# Altium PCB FRONT-UNIT-7.PcbDoc (part 1 of 2)
Units mm, origin at the board's own origin, x right, y up, seen from the top; angles counter-clockwise.
Board outline 281 x 128.5 mm, 2 copper layers (Top Layer, Top, Bottom Layer, Bottom), stack 1.671 mm thick; 95 components, 85 nets, 388 pads, 394 vias.
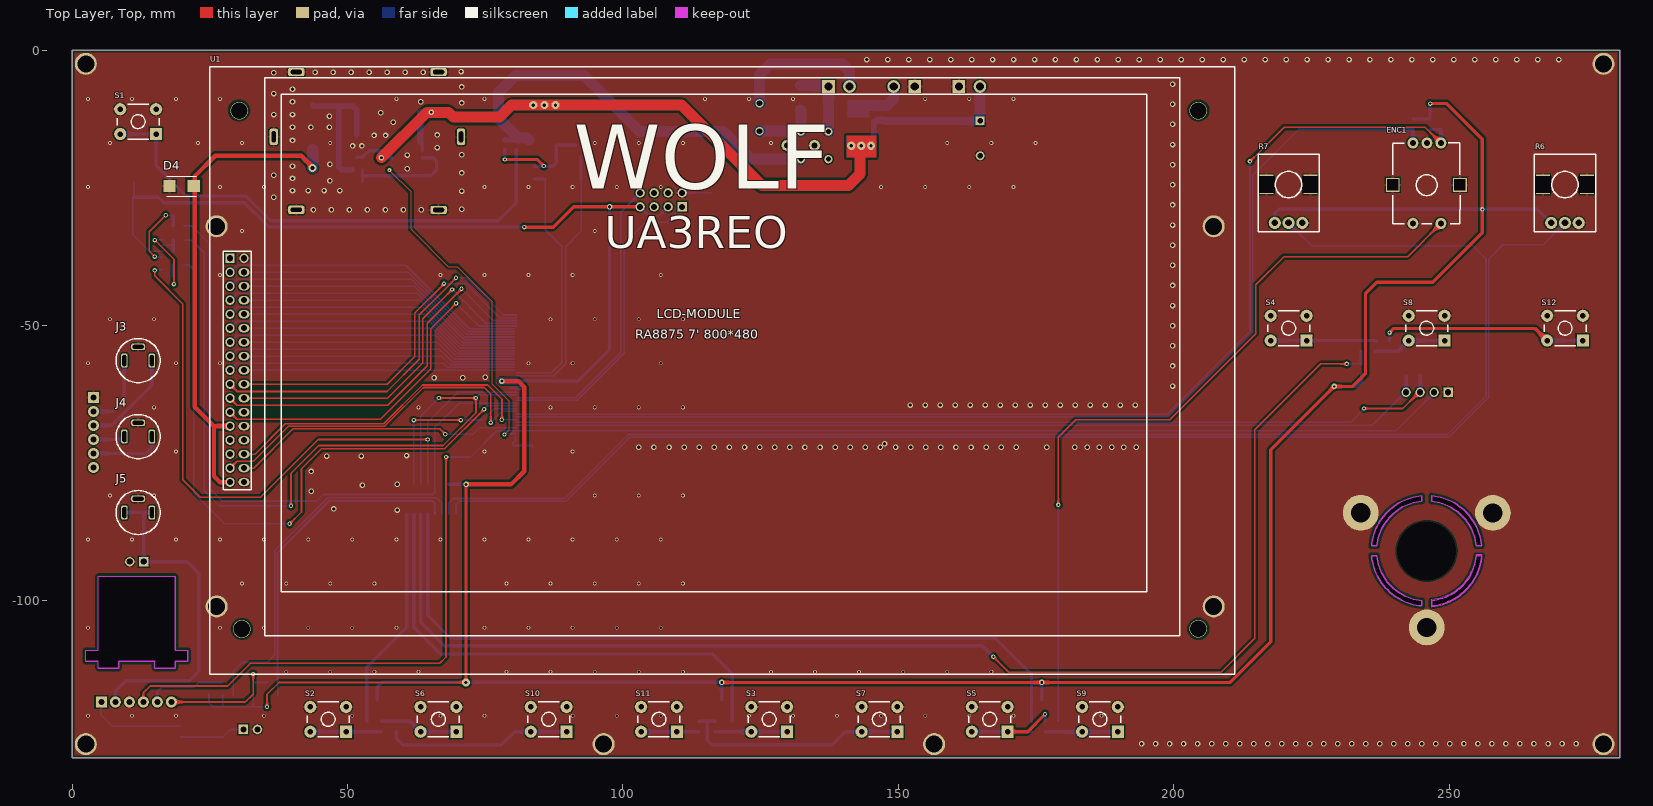
[diagram p0: Top Layer, Top view]
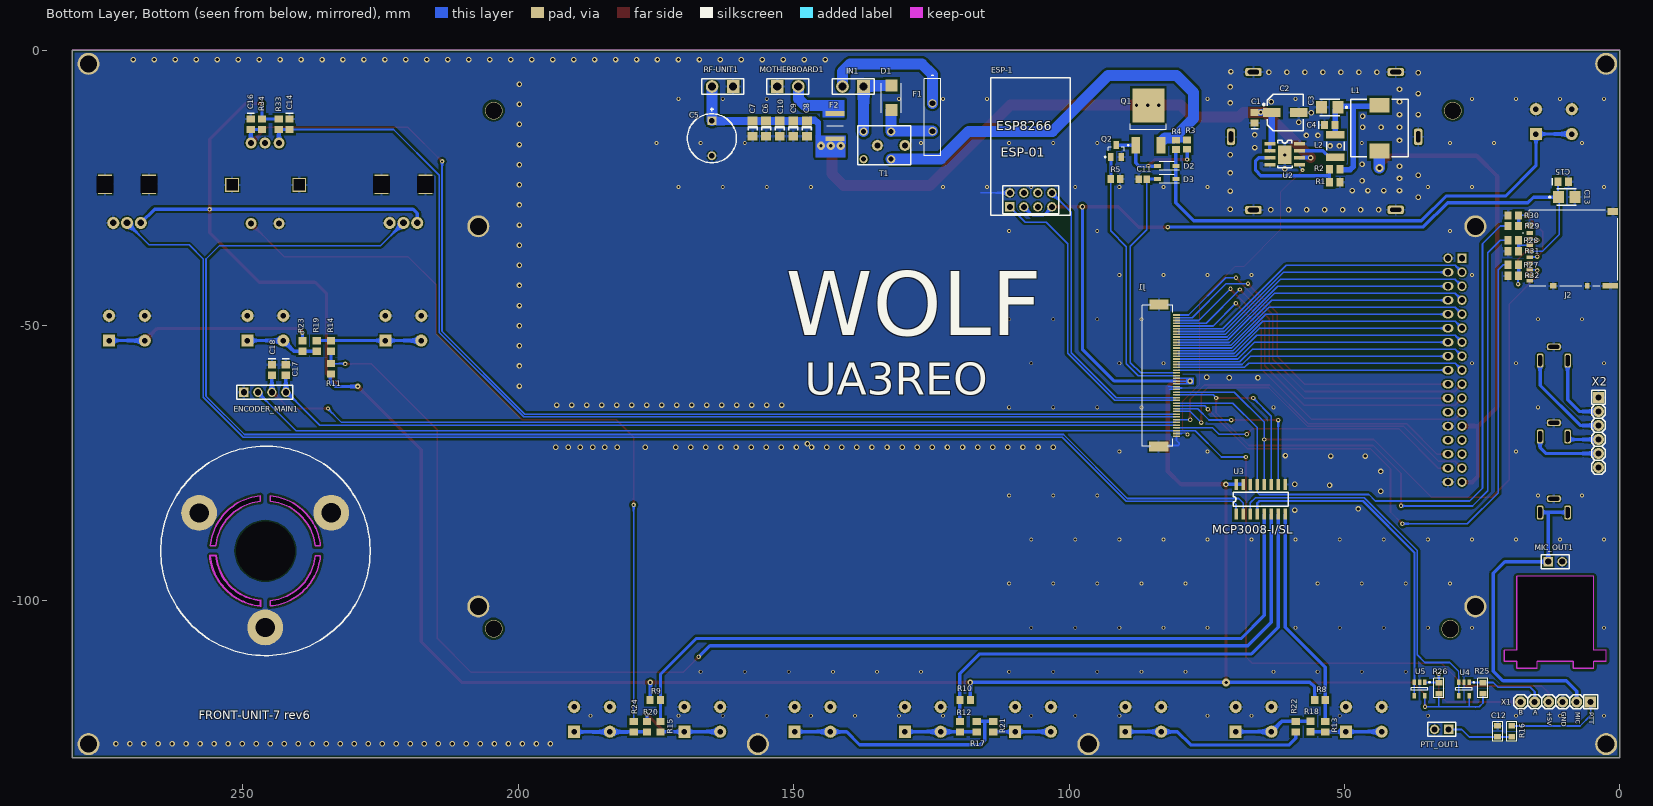
[diagram p1: Bottom Layer, Bottom view, seen from below]

## Layer stack, top to bottom
Top Solder, Top Mask: solder mask 0.0102, Solder Resist, Dk 3.5
Top Layer, Top: signal copper 0.0356
Dielectric 1: dielectric 1.6, FR-4, Dk 4.8
Bottom Layer, Bottom: signal copper 0.0356
Bottom Solder, Bot Mask: solder mask 0.0102, Solder Resist, Dk 3.5

## Board outline
0,-1 0,0 281,0 281,-128.5 0,-128.5
cut-out: 255.937,-91.681 ccw(c255.85,-91.775) 255.85,-91.647 254.925,-91.647 ccw(c254.925,-91.775) 254.798,-91.775 ccw(c254.925,-91.775) 254.798,-91.776 ccw(c254.923,-91.797) 254.796,-91.785 cw(c245.9,-90.925) 246.833,-99.814 ccw(c246.846,-99.941) 246.729,-99.891 ccw(c246.825,-99.975) 246.698,-99.975 246.698,-100.9 ccw(c246.825,-100.9) 246.769,-101.014 ccw(c246.846,-100.913) 246.858,-101.04 ccw(c245.9,-90.925) 256.021,-91.813 ccw(c255.895,-91.802)
cut-out: 255.896,-90.023 ccw(c245.9,-90.925) 246.806,-80.929 246.8,-80.95 246.8,-81.9 246.802,-81.909 cw(c245.9,-90.925) 254.915,-90.014 254.925,-90.025
cut-out: 245.036,-80.929 ccw(c245.9,-90.925) 235.907,-90.026 235.925,-90.025 236.875,-90.025 cw(c245.9,-90.925) 245.027,-81.897 245.05,-81.9
cut-out: 245.051,-99.961 cw(c245.9,-90.925) 236.866,-91.794 236.85,-91.775 235.9,-91.775 235.899,-91.773 ccw(c245.9,-90.925) 245.046,-100.925 245.05,-100.9
cut-out: 4.75,-112.25 4.75,-111 2.5,-111 2.5,-109 4.75,-109 4.75,-95.5 18.75,-95.5 18.75,-109 21,-109 21,-111 18.75,-111 18.75,-112.25 15,-112.25 15,-111 8.5,-111 8.5,-112.25

## Design rules (kind name [scope] priority, off if disabled: settings)
BoardOutlineClearance [All] p1: gap=0.3 ignorepadtopadclearanceinfootprint=FALSE
Clearance Clearance_NPTH [All vs InPadClass('NPTH')] p1: gap=0.4 ignorepadtopadclearanceinfootprint=FALSE except(0: Arc-Hole Track-Hole SMDPad-Hole THPad-Hole Via-Hole Fill-Hole Poly-Hole Region-Hole Text-Hole)
Clearance Clearance_MultiLayerPad [OnLayer('Multi-Layer') and IsPad] p2: gap=0.25 ignorepadtopadclearanceinfootprint=FALSE except(0: Arc-Hole Track-Hole SMDPad-Hole THPad-Hole Via-Hole Fill-Hole Poly-Hole Region-Hole Text-Hole)
Clearance Clearance_Polygon [InPolygon] p3: gap=0.4 ignorepadtopadclearanceinfootprint=FALSE except(0: Arc-Hole Track-Hole SMDPad-Hole THPad-Hole Via-Hole Fill-Hole Poly-Hole Region-Hole Text-Hole; 1: Poly-Poly)
Clearance [All] p4: gap=0.15 ignorepadtopadclearanceinfootprint=FALSE except(0: Arc-Hole Track-Hole SMDPad-Hole THPad-Hole Via-Hole Fill-Hole Poly-Hole Region-Hole Text-Hole)
ComponentClearance [All] p1: gap=0 collisioncheckmode=3 verticalgap=0 showdistances=FALSE
Height [All] p1: minheight=0 maxheight=60 prefheight=12.7
HoleSize [All] p1: absolutevalues=TRUE maxlimit=5 minlimit=0.025 maxpercent=80.000 minpercent=20.000
HoleToHoleClearance [All] p1: gap=0.2 allowstackedmicrovias=TRUE
MinimumSolderMaskSliver [All] p1: minsoldermaskwidth=0.04
PlaneClearance [All] p1: clearance=0.5
PlaneConnect [All] p1: planeconnectstyle=Relief reliefexpansion=0.5 reliefentries=4 reliefconductorwidth=0.3 reliefairgap=0.2
PolygonConnect PolygonConnect_PowerPAD [All vs InPadClass('PowerPAD')] p1: connectstyle=Relief reliefconductorwidth=1 reliefentries=4 polygonreliefangle="90 Angle" airgapwidth=0.3
PolygonConnect PolygonConnect_PadGND [InNet('GND') and IsPad] p2: connectstyle=Relief reliefconductorwidth=0.5 reliefentries=4 polygonreliefangle="90 Angle" airgapwidth=0.2
PolygonConnect PolygonConnect_Via [IsVia] p3: connectstyle=Direct reliefconductorwidth=0.254 reliefentries=4 polygonreliefangle="90 Angle" airgapwidth=0.254
PolygonConnect [All] p4: connectstyle=Relief reliefconductorwidth=0.6 reliefentries=4 polygonreliefangle="90 Angle" airgapwidth=0.3
RoomDefinition FRONT-UNIT-7 [InComponentClass('FRONT-UNIT-7')] p1: confinementstyle=ConfineIn formatcopy=TRUE lockcomponents=FALSE outline 0,-128.862 280.5,-128.862 280.5,1 0,1
RoutingVias [All] p1: holewidth=0.3 width=0.7 viastyle="Through Hole" minholewidth=0.3 minwidth=0.7 maxholewidth=3 maxwidth=5
SilkToSilkClearance [All] p1: silktosilkclearance=0
SilkToSolderMaskClearance [IsPad] p1: minsilkscreentomaskgap=0.05 clearancetoexposedcopper=TRUE
SolderMaskExpansion [All] p1: expansion=0.075 istentingtop=FALSE
Width [All] p1: maxlimit=10 minlimit=0.15 preferedwidth=0.3
21 further rules are at their usual default settings.

## Components (designator, comment, footprint, x,y, rotation, side; value= is the part's Value field where it differs from the comment)
C1 "100n" CAP_0805 66.325,-12.5 r90 bottom
C2 "4.7uF 16V" CAPAE_6.6x6.6h5.4 60.85,-11.35 r180 bottom
C3 "22uF 10V" CAPAE_4.3x4.3h5.4 52.3,-10.4 r0 bottom
C4 "100n" CAP_0805 52.9,-13.6 r180 bottom
C5 "1000uF" CAP250RP 164.85,-15.473 r270 bottom
C6 "1uF" CAP_1206 154.988,-14.265 r270 bottom
C7 "100n" CAP_1206 157.446,-14.265 r270 bottom
C8 "1n" CAP_1206 147.614,-14.265 r270 bottom
C9 "470p" CAP_1206 150.072,-14.265 r270 bottom
C10 "120p" CAP_1206 152.53,-14.265 r270 bottom
C11 "8.2n" CAPC2013X94X50LL20T25 86.625,-23.425 r180 bottom
C12 "0.1" CH0805C 22.2,-123.7 r270 bottom
C13 "22uF 10V" EEEFC_sizeB 10.1,-26.7 r180 bottom
C14 "100n" CAP_0805 241.525,-13.275 r270 bottom
C15 "100n" CAP_0805 10.5,-23.9 r180 bottom
C16 "100n" CAP_0805 248.575,-13.275 r270 bottom
C17 "10n" CAP_0805 242.2,-57.875 r270 bottom
C18 "10n" CAP_0805 244.7,-57.875 r270 bottom
D1 "SM6T15A" SMBJ36CATR 132.25,-8.671 r90 bottom
D2 "1n4148w" SOD3716X135N 82.275,-21.075 r0 bottom
D3 "1n4148w" SOD3716X135N 82.275,-23.425 r0 bottom
D4 "SMAJ5.0A-TR" SMBJ36CATR 19.9,-24.7 r180 top
ENC1 "PEC12" PEC12 245.85,-24.183 r0 top
ENCODER_MAIN1 "OPTICAL ENCODER" 644456-4 245.995,-61.49 r180 bottom
ESP-1 "ESP-01 ESP8266" "ESP-01 ESP8266" 107,-17.525 r180 bottom
F1 "RUEF400" RUEF400 124.8,-12.198 r270 bottom
F2 "MF-MSMF110_16-2" FUSC4632X85N 142.475,-13.823 r90 bottom
IN1 "JX2" JX2 139.225,-6.623 r0 bottom value=13.8V
J1 "FPC-45P-0.5mm" FH12S45S05SH60 81.15,-59.1 r90 bottom
J2 "DM3AT-SF-PEJM5" DM3ATSFPEJM5 9,-36 r90 bottom
J3 "PJ-3,5" Audio-PJ-392 11.4,-62.275 r0 top
J4 "PJ-3,5" Audio-PJ-392 11.4,-76.067 r0 top
J5 "PJ-3,5" Audio-PJ-392 11.4,-89.858 r0 top
L1 "10uH" IND_FERRITE_CORE 43.675,-14.175 r90 bottom
L2 "3.3uH" IND_1812 51.675,-17.425 r90 bottom
MIC_OUT1 "MIC_OUT" 51022-0200 11.75,-92.25 r180 bottom
MOTHERBOARD1 "JX2" JX2 151.062,-6.623 r180 bottom value=13.8V
PTT_OUT1 "PTT_OUT" 51022-0200 32.38,-123.96 r0 bottom
Q1 "IRFR9024NPBF" ONSC-DPAK-3-369C-01_V 85.625,-12.9 r90 bottom
Q2 "BSS123" FAIR-SOT23-3_V 91.45,-18.325 r180 bottom
R1 "4.7k" RES_0805 51.775,-24.025 r0 bottom
R2 "15k" RES_0805 51.775,-21.625 r180 bottom
R3 "30k" RESC2013X60X40NL20T25 78.575,-17.175 r90 bottom
R4 "30k" RESC2013X60X40NL20T25 80.625,-17.2 r90 bottom
R5 "30k" RESC2013X60X40NL20T25 91.6,-23.425 r0 bottom
R6 "ptv09a-4225f-b102" PTV09 271.025,-25.925 r0 top value="AF GAIN 1k"
R7 "ptv09a-4225f-b102" PTV09 220.85,-25.925 r0 top value="SHIFT 1k"
R8 "4.7k" RES_0805 54.45,-117.975 r0 bottom
R9 "4.7k" RES_0805 175.125,-117.975 r0 bottom
R10 "4.7k" RES_0805 118.875,-117.975 r180 bottom
R11 "4.7k" RES_0805 233.975,-57.875 r270 bottom
R12 "1k" RES_0805 119.825,-122.825 r90 bottom
R13 "1k" RES_0805 53.5,-122.825 r90 bottom
R14 "1k" RES_0805 233.975,-53.725 r270 bottom
R15 "1k" RES_0805 174.175,-122.825 r90 bottom
R16 "100" CH0805R 19.65,-123.7 r270 bottom
R17 "2k" RES_0805 116.788,-122.825 r270 bottom
R18 "2k" RES_0805 56.175,-122.798 r270 bottom
R19 "2k" RES_0805 236.575,-53.725 r90 bottom
R20 "2k" RES_0805 176.612,-122.825 r90 bottom
R21 "4.7k" RES_0805 113.75,-122.825 r90 bottom
R22 "4.7k" RES_0805 58.85,-122.825 r90 bottom
R23 "4.7k" RES_0805 239.175,-53.725 r270 bottom
R24 "4.7k" RES_0805 179.05,-122.825 r270 bottom
R25 "47k" CH0805R 24.875,-115.825 r270 bottom
R26 "47k" CH0805C 32.875,-115.825 r270 bottom
R27 "0" RES_0805 19.35,-39 r0 bottom
R28 "0" RES_0805 19.35,-34.525 r0 bottom
R29 "0" RES_0805 19.35,-31.95 r0 bottom
R30 "3.3k" RES_0805 19.35,-30.025 r180 bottom
R31 "3.3k" RES_0805 19.35,-36.525 r180 bottom
R32 "3.3k" RES_0805 19.35,-41 r180 bottom
R33 "4.7k" RES_0805 243.45,-13.475 r90 bottom
R34 "4.7k" RES_0805 246.525,-13.475 r90 bottom
RF-UNIT1 "JX2" JX2 162.9,-6.623 r0 bottom value=13.8V
S1 "PTS645SK50LFS" PTS645SK50LFS 12,-13 r180 top value=PWR
S2 "PTS645SK50LFS" PTS645SK50LFS 46.5,-121.5 r180 top
S3 "PTS645SK50LFS" PTS645SK50LFS 126.557,-121.5 r180 top
S4 "PTS645SK50LFS" PTS645SK50LFS 220.85,-50.498 r180 top
S5 "PTS645SK50LFS" PTS645SK50LFS 166.586,-121.5 r180 top
S6 "PTS645SK50LFS" PTS645SK50LFS 66.514,-121.5 r180 top
S7 "PTS645SK50LFS" PTS645SK50LFS 146.571,-121.5 r180 top
S8 "PTS645SK50LFS" PTS645SK50LFS 245.9,-50.498 r180 top
S9 "PTS645SK50LFS" PTS645SK50LFS 186.6,-121.5 r180 top
S10 "PTS645SK50LFS" PTS645SK50LFS 86.529,-121.5 r180 top
S11 "PTS645SK50LFS" PTS645SK50LFS 106.543,-121.5 r180 top
S12 "PTS645SK50LFS" PTS645SK50LFS 271.025,-50.498 r180 top
T1 "BNX016-01" TRANSF_ICORE 133.55,-17.323 r180 bottom
U1 "LCD-RA8875" LCD-RA8875 25,-3 r0 top locked
U2 "ST1S10" ST1S10 60.85,-18.9 r180 bottom
U3 "MCP3008-I/SL" MCP3008-I/SL 65.2,-81.55 r90 bottom
U4 "MCP6001UT" SOT23-5 28.325,-115.975 r270 bottom
U5 "MCP6001UT" SOT23-5 36.375,-115.975 r270 bottom
X1 "PTT" "CON: PLS-6" 11.675,-118.35 r0 bottom
X2 "PTT" "CON: PLS-6" 3.9,-69.425 r270 bottom

## Footprints (in the part's own frame and the unit in brackets; to place one, negate y for a bottom-side part, rotate by r counter-clockwise, add the part's x,y. Pads: shape width x height; smd on the part's side, far side on the other; paste and mask are expansions set on the pad)
51022-0200 [mm]
  rect 1.7x1.7 hole 1.1: 1(-1.27,-0.635)
  round 1.7 hole 1.1: 2(1.27,-0.635)
  silkscreen extent -2.54,-1.91 2.54,0.64
644456-4 [mm]
  rect 1.7x1.7 hole 1.1: 1(-3.81,-0.635)
  round 1.7 hole 1.1: 2(-1.27,-0.635) 3(1.27,-0.635) 4(3.81,-0.635)
  silkscreen extent -5.08,-1.91 5.08,0.64
Audio-PJ-392 [mm]
  rrect50% 2.5x1.2 hole 2 slot 0.7 at 90 deg: 1(0.6,8.4)
  rrect50% 1.2x2.5 hole 2 slot 0.7 at 0 deg: 2(-1.9,5.9) 3(3.1,5.9)
  silkscreen extent -3.4,1.9 4.6,9.9, body extent -3.69,1.36 4.84,10.52, height 5.8
CAP250RP [mm]
  rect 1.6x1.6 hole 1: 1(-2.631,0)
  round 1.6 hole 1: 2(3.719,0)
  silkscreen extent -4.99,-4.45 4.99,4.45
CAP_0805 [mm]
  rect 1.3x1.5 smd: 1(-0.75,0) 2(1.15,0)
  silkscreen extent -1.8,-0.65 -1.8,0.65
CAP_1206 [mm]
  rect 1.6x1.8 smd: 1(-1.4,0) 2(1.4,0)
  silkscreen extent -0.3,-0.8 0.3,0.8
CAPAE_4.3x4.3h5.4 [mm]
  rect 2x2.2 smd: 1(-1.1,0) 2(1.9,0)
  silkscreen extent -2.9,-1.5 2.2,1.5
CAPAE_6.6x6.6h5.4 [mm]
  rect 3.15x1.6 smd: 1(-2.362,0) 2(2.538,0)
  silkscreen extent -4.11,-3.3 3.39,3.3
CAPC2013X94X50LL20T25 [mm] "Chip Capacitor, 2-Leads, Body 2.01x1.25mm, IPC High Density"
  rect 1.15x1.35 smd: 1(-0.725,0) 2(0.725,0)
  body extent -1.1,-0.72 1.1,0.72, height 0.94
CH0805C [mm] "Chip Capacitor, 2-Leads, Body 2,00x1,20mm, IPC Medium Density"
  rect 1x1.25 smd: 1(-1,0) 2(1,0)
  silkscreen extent -1.8,-0.9 1.8,0.9, body extent -1,-0.62 1,0.63, height 0.78
CH0805R [mm]
  rect 1x1.25 smd: 1(-1,0) 2(1,0)
  silkscreen extent -1.8,-0.9 1.8,0.9, body extent -1,-0.6 1,0.6, height 0.44
"CON: PLS-6" [mm]
  rect 2x2 hole 1.1: 1(-6.35,0)
  round 2 hole 1.1: 2(-3.81,0) 3(-1.27,0) 4(1.27,0) 5(3.81,0) 6(6.35,0)
  silkscreen extent -7.62,-1.27 7.62,1.27, body extent -7.62,-1.27 7.62,1.27, height 8.54
DM3ATSFPEJM5 [mm]
  rect 0.7x1.2 smd: 1(2.775,7.412) 2(1.675,7.412) 3(0.575,7.412) 4(-0.525,7.412) 5(-1.625,7.412) 6(-2.725,7.412) 7(-3.825,7.412) 8(-4.925,7.412) MP2(-5.875,7.412)
  rect 1x1.2 smd: MP1(4.325,7.412) MP3(-6.825,3.112)
  rect 1x0.8 smd: MP4(-6.825,-3.087)
  rect 1x2.8 smd: MP5(-6.825,-7.237)
  rect 1.3x1.9 smd: MP6(6.675,-7.688)
  silkscreen extent -6.93,-8.64 6.93,8.64, body extent -7.24,-8.64 7.19,7.94, height 1.93
EEEFC_sizeB [mm]
  rect 2x2.2 smd: 1(-1.1,0) 2(1.9,0)
  silkscreen extent -2.9,-1.5 2.2,1.5
"ESP-01 ESP8266" [mm]
  round 1.7 hole 1.1: 1(-3.76,-8.4) 2(-1.22,-8.4) 3(1.32,-8.4) 4(3.86,-8.4) 6(-1.22,-10.94) 7(1.32,-10.94) 8(3.86,-10.94)
  rect 1.7x1.7 hole 1.1: 5(-3.76,-10.94)
  silkscreen extent -7.25,-12.5 7.25,12.5
FAIR-SOT23-3_V [mm] "SOT23, 3-Leads, Body 2.92x1.3mm, Pitch 0.95mm"
  rect 1x1.4 smd: 1(-0.95,-1.1) 2(0.95,-1.1) 3(0,1.1)
  silkscreen extent -2.13,-1.22 1.46,0.65, body extent -1.46,-0.65 1.46,0.65, height 1.2
FH12S45S05SH60 [mm]
  rect 0.3x1.3 smd: 1(11,-0.65) 2(10.5,-0.65) 3(10,-0.65) 4(9.5,-0.65) 5(9,-0.65) 6(8.5,-0.65) 7(8,-0.65) 8(7.5,-0.65) 9(7,-0.65) 10(6.5,-0.65) 11(6,-0.65) 12(5.5,-0.65) 13(5,-0.65) 14(4.5,-0.65) 15(4,-0.65) 16(3.5,-0.65) 17(3,-0.65) 18(2.5,-0.65) 19(2,-0.65) 20(1.5,-0.65) 21(1,-0.65) 22(0.5,-0.65) 23(0,-0.65) 24(-0.5,-0.65) 25(-1,-0.65) 26(-1.5,-0.65) 27(-2,-0.65) 28(-2.5,-0.65) 29(-3,-0.65) 30(-3.5,-0.65) 31(-4,-0.65) 32(-4.5,-0.65) 33(-5,-0.65) 34(-5.5,-0.65) 35(-6,-0.65) 36(-6.5,-0.65) 37(-7,-0.65) 38(-7.5,-0.65) 39(-8,-0.65) 40(-8.5,-0.65) 41(-9,-0.65) 42(-9.5,-0.65) 43(-10,-0.65) 44(-10.5,-0.65) 45(-11,-0.65)
  rect 1.8x3.5 smd: 46(-12.9,2.6) 47(12.9,2.54)
  silkscreen extent -12.8,0 12.8,5.6, body extent -13.62,-5.6 13.62,1.27, height 2.1
FUSC4632X85N [mm]
  rect 0.85x3.43 smd: 1(-2.3,0) 2(2.3,0)
  silkscreen extent 0,-1.52 0,1.52, body extent -2.28,-1.62 2.28,1.62, height 0.85
IND_1812 [mm]
  rect 1.4x3.4 smd: 1(-2.05,0) 2(2.05,0)
  silkscreen extent -0.8,-1.6 0.8,1.6
IND_FERRITE_CORE [mm]
  rect 2.7x3.6 smd: 1(-4.15,0) 2(4.15,0)
  silkscreen extent -5.2,-5.2 5.2,5.2
JX2 [mm]
  rect 2.3x2.3 hole 1.5: 1(-1.905,0)
  round 2.3 hole 1.5: 2(1.905,0)
  silkscreen extent -3.81,-1.4 3.81,1.4
LCD-RA8875 [mm]
  rect 1.7x1.7 hole 1.1: 1(3.683,-34.798)
  round 1.7 hole 1.1: 2(6.223,-34.798) 3(3.683,-37.338) 5(3.683,-39.878) 7(3.683,-42.418) 9(3.683,-44.958) 11(3.683,-47.498) 13(3.683,-50.038) 15(3.683,-52.578) 17(3.683,-55.118) 19(3.683,-57.658) 21(3.683,-60.198) 23(3.683,-62.738) 25(3.683,-65.278) 27(3.683,-67.818) 29(3.683,-70.358) 31(3.683,-72.898) 33(3.683,-75.438)
  oval 2x1.5 hole 1.1: 4(6.223,-37.338) 6(6.223,-39.878) 8(6.223,-42.418) 10(6.223,-44.958) 12(6.223,-47.498) 14(6.223,-50.038) 16(6.223,-52.578) 18(6.223,-55.118) 20(6.223,-57.658) 22(6.223,-60.198) 24(6.223,-62.738) 26(6.223,-65.278) 28(6.223,-67.818) 30(6.223,-70.358) 32(6.223,-72.898) 34(6.223,-75.438)
  silkscreen extent 0,-110.36 186.06,0
MCP3008-I/SL [mm]
  rect 2x0.6 smd: 1(-2.7,4.445) 2(-2.7,3.175) 3(-2.7,1.905) 4(-2.7,0.635) 5(-2.7,-0.635) 6(-2.7,-1.905) 7(-2.7,-3.175) 8(-2.7,-4.445) 9(2.7,-4.445) 10(2.7,-3.175) 11(2.7,-1.905) 12(2.7,-0.635) 13(2.7,0.635) 14(2.7,1.905) 15(2.7,3.175) 16(2.7,4.445)
  silkscreen extent -1.3,-5 1.3,5
ONSC-DPAK-3-369C-01_V [mm] "DPAK, 3-Leads, Body 6.54x6.095mm, Pitch 2.29mm"
  rect 3x1.6 smd: 1(-4.4,2.29) 3(-4.4,-2.29)
  rect 6.2x5.8 smd: 4(2.8,0)
  silkscreen extent -4.52,-3.27 -0.45,3.77, body extent -1.6,-3.27 4.49,3.27, height 2.38
PEC12 [mm]
  round 2 hole 1.1: 1(-2.44,-7.303) 2(2.64,-7.303) 3(2.64,7.302) 4(0.1,7.302) 5(-2.44,7.302)
  rect 2.5x2.5 hole 2 square: 6(-6.1,-0.318) 7(6.1,-0.318)
  silkscreen extent -6.12,-7.32 6.12,7.38
PTS645SK50LFS [mm]
  rect 2.2x2.2 hole 1: 1(-3.25,2.25)
  round 2.2 hole 1: 2(3.25,2.25) 3(3.25,-2.25) 4(-3.25,-2.25)
  silkscreen extent -3.81,-3.17 3.81,3.18
PTV09 [mm]
  round 2.2 hole 1.2: 1(-2.515,-5.465) 2(-0.015,-5.465) 3(2.485,-5.465)
  rect 2.5x3.5 hole 3 square: 4(-4.015,1.535) 5(3.985,1.535)
  silkscreen extent -5.56,-7.03 5.56,7.03
RES_0805 [mm]
  rect 1.3x1.5 smd: 1(-0.95,0) 2(0.95,0)
RESC2013X60X40NL20T25 [mm] "Chip Resistor, 2-Leads, Body 2.00x1.25mm, IPC Medium Density"
  rect 1.2x1.45 smd: 1(-0.85,0) 2(0.85,0)
  body extent -1.1,-0.72 1.1,0.72, height 0.6
RUEF400 [mm]
  round 1.515 hole 1.01: 1(-2.525,0) 2(2.525,0)
  silkscreen extent -7.7,-1.5 7,1.5, body extent -7,-1.5 7,1.5, height 19.1
SMBJ36CATR [mm]
  rect 2.2x2.15 smd: 1(-2.2,0) 2(2.2,0)
  silkscreen extent -2.68,-1.81 2.68,1.81, body extent -3.08,-1.81 3.09,1.81, height 2.75
SOD3716X135N [mm]
  rect 1.25x0.75 smd: 1(-1.65,0) 2(1.65,0)
  silkscreen extent -2.27,-0.77 1.35,0.77, body extent -1.85,-0.78 1.85,0.78, height 1.35
SOT23-5 [mm] "SOT23, 5-Leads, Body 2,90x2,80mm, Pitch 0,95mm, IPC Medium Density"
  rect 1x0.6 smd: 1(-1.2,0.95) 2(-1.2,0) 3(-1.2,-0.95) 4(1.2,-0.95) 5(1.2,0.95)
  round 0.5 on Mech2: ""(-1.1,1.1)
  silkscreen extent -1.32,-1.5 0.25,1.92, body extent -1.5,-1.5 1.5,1.5, height 1.3
ST1S10 [mm]
  rect 2x0.6 smd: 1(-2.7,1.905) 2(-2.7,0.635) 3(-2.7,-0.635) 4(-2.7,-1.905) 5(2.7,-1.905) 6(2.7,-0.635) 7(2.7,0.635) 8(2.7,1.905)
  rect 2.41x3.3 smd: 9(0,-0.1)
  silkscreen extent -1.32,-2.5 1.32,2.5
TRANSF_ICORE [mm]
  round 2 hole 1.1: LCG1(-1.25,0.01) LCG2(3.75,0.01)
  round 1.5 hole 0.9: LCG3(-3.75,-2.49) LCP(1.25,-2.49) P(1.25,2.51) PSG(-3.75,2.51)
  silkscreen extent -4.81,-3.54 4.81,3.54

## Part data
C1 C4 C14 C15 C16 C17 C18: library part CAP_0805, "CAP_0805"
C2: library part CAPAE_6.6x6.6h5.4, "CAPAE_6.6x6.6h5.4"
C3: library part CAPAE_4.3x4.3h5.4, "CAPAE_4.3x4.3h5.4"
C5: library part CAP250RP, "CAP250RP"
C6 C7 C8 C9 C10: library part CAP_1206, "CAP_1206"
C11: library part CMP-2007-04444-1, "CAP_1206", Manufacturer="AVX Interconnect / Elco", Part Number=08055C822KAT2A
C12: library part Capacitor
C13: library part EEEFC_sizeB, "EEEFC_sizeB"
D1: "Diode", Manufacturer_Name=STMicroelectronics, Mouser Part Number=511-SM6T15A, RS Part Number=4864915P, Allied_Number=70390432, Allied Price/Stock=http://www.alliedelec.com/stmicroelectronics-sm6t15a/70390432/, Datasheet Link=http://www.st.com/web/en/resource/technical/document/datasheet/CD00000725.pdf, Height=2.65mm, Manufacturer_Part_Number=SM6T15A, Mouser Price/Stock=https://www.mouser.com/Search/Refine.aspx?Keyword=511-SM6T15A, RS Price/Stock=http://uk.rs-online.com/web/p/products/4864915P
D2 D3: "Diode", Manufacturer_Name=Vishay, Datasheet Link=http://www.vishay.com/docs/85748/1n4148w.pdf, Height=1.35mm, Manufacturer_Part_Number=1n4148w
D4: library part SMLVT3V3, "Diode", LCSC Part #=test, Manufacturer_Name=STMicroelectronics, Mouser Part Number=511-SMLVT3V3, RS Part Number=5444821P, Allied Price/Stock=http://www.alliedelec.com/stmicroelectronics-smlvt3v3/70013736/, Allied_Number=70013736, Datasheet Link=http://www.st.com/web/en/resource/technical/document/datasheet/CD00000923.pdf, Height=2.65mm, Manufacturer_Part_Number=SMLVT3V3, Mouser Price/Stock=https://www.mouser.com/Search/Refine.aspx?Keyword=511-SMLVT3V3, RS Price/Stock=http://uk.rs-online.com/web/p/products/5444821P
ENCODER_MAIN1: library part 644456-4
F1: "Fuse", Manufacturer_Name=LITTELFUSE, Mouser Part Number=650-RUEF400, RS Part Number=5176837P, Datasheet Link=https://componentsearchengine.com/Datasheets/1/RUEF400.pdf, Height=19mm, Manufacturer_Part_Number=RUEF400, Mouser Price/Stock=https://www.mouser.co.uk/ProductDetail/Littelfuse/RUEF400?qs=hv6pn79dJPQHuFVnpNF%2FDg%3D%3D, RS Price/Stock=http://uk.rs-online.com/web/p/products/5176837P
F2: "Fuse", Manufacturer_Name=Bourns, Manufacturer_Part_Number=MF-MSMF110/16-2, Mouser Part Number=652-MF-MSMF110/16-2, RS Part Number=6478207P, Allied_Number=70153434, Allied Price/Stock=https://www.alliedelec.com/bourns-mf-msmf110-16-2/70153434/, Datasheet Link=https://componentsearchengine.com/Datasheets/2/MF-MSMF110_16-2.pdf, Height=0.85mm, Mouser Price/Stock=https://www.mouser.co.uk/ProductDetail/Bourns/MF-MSMF110-16-2?qs=wksszfECgvir54ST3ixUHA%3D%3D, RS Price/Stock=http://uk.rs-online.com/web/p/products/6478207P
J1: library part FH12S-45S-0.5SH_55_, "Connector", Manufacturer_Name=Hirose, Manufacturer_Part_Number=FH12S-45S-0.5SH(55), Mouser Part Number=798-FH12S-45S-05SH55, RS Part Number=1620942, Datasheet Link=https://www.hirose.com/product/en/download_file/key_name/FH12S-45S-0.5SH%2855%29/category/Drawing%20(2D)/doc_file_id/43881/?file_category_id=6&item_id=05860665055&is_series=, Height=2mm, Mouser Price/Stock=https://www.mouser.co.uk/ProductDetail/Hirose-Connector/FH12S-45S-05SH55?qs=0N%252BVULUZFj%252BE0LA99Ny0NA%3D%3D, RS Price/Stock=http://uk.rs-online.com/web/p/products/1620942
J2: "Connector", Manufacturer_Name=HRS(Hirose), Datasheet Link=https://datasheet.lcsc.com/szlcsc/Hirose-HRS-DM3AT-SF-PEJM5_C114218.pdf, Height=1.83mm, Manufacturer_Part_Number=DM3AT-SF-PEJM5
L1: library part IND_FERRITE_CORE, "Inductor"
L2: library part IND_1812, "IND_1812"
MIC_OUT1 PTT_OUT1: library part 51022-0200, "51022-0200"
Q1: library part CMP-1058-00387-1, "IRFR9024NPBF, Транзистор, Р-канал 55В 11А", Manufacturer="On Semiconductor", Package Type="DPAK-3, IPAK-4", PartNumber=NTD2955G, Channel Polarity="P Channel", Ciss Typ (pF)=500, ComponentLink1Description="Manufacturer URL", ComponentLink1URL=http://www.onsemi.com/, ComponentLink2Description=Datasheet, ComponentLink2URL=http://www.onsemi.cn/pub_link/Collateral/NTD2955-D.PDF, ComponentLink3Description="Package Specification", ComponentLink3URL=http://www.onsemi.cn/pub_link/Collateral/369C.PDF, Configuration=Single, Coss Typ (pF)=150, Crss Typ (pF)=50, DatasheetVersion="Rev. 13", ID Max (A)=12, Mounting Technology="Surface Mount", PackageDescription="3-Pin Flange Mount, Body 6.54 x 6.095 mm, Pitch 2.29 mm", PackageReference=DPAK-3-369C-01, PackageVersion="Rev. E, 02/2014", Packing="Tape and Reel", PD Max (W)=55, Qrr Typ (nC)=100, RoHS=Pb-Free, V(BR)DSS Min (V)=60, VGS(th) Max (V)=4, VGS Max (V)=20
Q2: library part CMP-2000-04934-1, "N-Channel Logic Level Enhancement Mode Field Effect Transistor, 1.7 V, -55 to 150 degC, 3-Pin SOT-23, RoHS, Tape and Reel", Manufacturer=Fairchild, Maximum Continuous Drain Current=0.17A, Maximum Drain Source Voltage=100V, Maximum Gate Source Voltage=±20V, Operating Temperature=-55to150degC, Package=3SOT-23, Package Description="3-Pin Small Outline Transistor, Body 2.92 x 1.325 mm, Pitch 0.95 mm", Package Reference=SOT23-3, Package Version="Rev. 12, 03/2016", Category=MOSFET, Channel Mode=Enhancement, Channel Type=N, Datasheet URL=https://www.fairchildsemi.com/datasheets/BS/BSS123.pdf, Datasheet Version=Jun-03, Manufacturer URL=https://www.fairchildsemi.com/, Mounting=SurfaceMount, Package URL=http://www.fairchildsemi.com/dwg/MA/MA03D.pdf, Packaging=Tape&Reel, Rad Hard=No, RDS-on=6000@10VmOhm, Typical Fall Time=2.4ns, Typical Rise Time=9ns, Typical Turn-Off Delay Time=17ns, Typical Turn-On Delay Time=1.7ns
R1 R2 R8 R9 R10 R11 R12 R13 R14 R15 R17 R18 R19 R20 R21 R22 R23 R24 R27 R28 R29 R30 R31 R32 R33 R34: library part RES_0805, "RES_0805"
R3 R4 R5: library part CMP-2001-00626-1, "RES_0805", Manufacturer=Panasonic, Part Number=ERA-6AEB303V
R6 R7: library part PTV09, "Adjustable Resistor PTV09"
R16 R25 R26: library part Resistor
S2: LCSC Part #=test
T1: library part TRANSF_ICORE
U4 U5: library part MCP6001UT_1
X1 X2: library part 6-Connector
ENC1: FULLNAME="Выключатель замыкающий с приводом нажатием кнопки"

## Free pads (board coordinates)
  round 6.5 hole 3.5: 2(233.95,-84) 2(245.925,-104.825) 2(257.925,-84.025)
  round 0.1 hole 10.7: 4(245.9,-90.925)
  round 4 hole 3.1: 6(2.5,-126) 6(2.5,-2.5) 6(26.25,-101) 6(26.25,-32) 6(96.5,-126) 6(156.5,-126) 6(207.25,-101) 6(207.25,-32) 6(278,-126) 6(278,-2.5)
  rrect50% 1.5x3 hole 0.8 slot 2 at 90 deg: 8(36.625,-15.75) 8(70.625,-15.762)
  rrect50% 3x1.5 hole 0.8 slot 2 at 0 deg: 8(40.708,-29) 8(40.708,-4) 8(66.542,-29.025) 8(66.542,-4)

## Via types
v1: diameter 1, hole 0.6, Top Layer, Top to Bottom Layer, Bottom, tented both sides, 198 vias
v2: diameter 0.7, hole 0.4, Top Layer, Top to Bottom Layer, Bottom, tented both sides, 139 vias
v3: diameter 0.8, hole 0.4, Top Layer, Top to Bottom Layer, Bottom, tented both sides, 36 vias
v4: diameter 1, hole 0.5, Top Layer, Top to Bottom Layer, Bottom, tented both sides, 6 vias
v5: diameter 1.5, hole 0.6, Top Layer, Top to Bottom Layer, Bottom, tented both sides, 6 vias
v6: diameter 3.2, hole 3, Top Layer, Top to Bottom Layer, Bottom, 4 vias
v7: diameter 0.7, hole 0.3, Top Layer, Top to Bottom Layer, Bottom, 2 vias
v8: diameter 1.5, hole 0.7, Top Layer, Top to Bottom Layer, Bottom, tented both sides, 1 vias
v9: diameter 1.4, hole 0.6, Top Layer, Top to Bottom Layer, Bottom, tented both sides, 1 vias
v10: diameter 1, hole 0.4, Top Layer, Top to Bottom Layer, Bottom, tented both sides, 1 vias

## Nets (pads, with @x,y where several pads share a name; then routed paths per layer and width w, separated by ;. In a path a pad name is that pad's centre, name@x,y a point inside that pad or via, vN(x,y) a via of type N, cw(c..) or ccw(c..) an arc to the next point about the centre after c; other vN are vias at no path point)
+3V3: C13.1 C15.1 ESP-1.6 ESP-1.8 J1.24 J1.25 J1.26 J2.4 R6.1 R7.1 R8.2 R9.2 R10.2 R11.2 R25.2 R26.2 R33.2 R34.2 U3.15 U3.16 U4.5 U5.5 | length 668
  Top Layer, Top w0.3: v3(35.4,-119.2) 35.4,-116.975 37.575,-114.8 v9(71.5,-114.8)
  Top Layer, Top w0.6: v9@71.525,-114.85 v4(71.525,-78.85) ; v3(82.075,-32.15) 87.35,-32.15 91.035,-28.465 ESP-1.8 ; v4(117.925,-114.8) v4@176,-114.8 ; v4(176.025,-114.8) 210.25,-114.8 217.6,-107.45 217.6,-72.575 v10@229.113,-61.062 ; v10(229.125,-61.075) 232.525,-61.075 234.8,-58.8 234.8,-44.225 236.875,-42.15 247,-42.15 256,-33.15 256,-16.175 249.55,-9.725 v3(246.55,-9.725)
  Top Layer, Top w0.8: v4(71.525,-78.85) 79.675,-78.85 82.075,-76.45 82.075,-61.175 81,-60.1 v4(78.05,-60.1)
  Bottom Layer, Bottom w0.3: C15.1 11.25,-26.65 C13.1 11,-26.9 11,-33.5 14,-36.5 16.387,-36.5 J2.4 ; R25.2 24.875,-118.55 25.55,-119.225 26.2,-119.225 ; 26.225,-119.25 26.2,-119.225 ; U4.5 27.375,-119.225 ; R26.2 32.875,-119.175 32.825,-119.225 ; U5.5 35.425,-119.225 32.825,-119.225 ; J1.26@80.675,-60.6 J1.26 80.35,-60.6 78.35,-60.6 v4@78.35,-60.1 ; J1.25@80.675,-60.1 J1.25 80.35,-60.1 v4@78.35,-60.1 ; J1.24@80.675,-59.6 J1.24 78.375,-59.6 78.35,-59.625 v4@78.35,-60.1 ; ESP-1.8 103.14,-28.565 104.675,-30.1 106.585,-30.1 ESP-1.6 ; 26.2,-119.225 27.375,-119.225 ; 27.375,-119.225 32.825,-119.225
  Bottom Layer, Bottom w0.6: C13.1 15.7,-26.7 16.7,-27.7 31.275,-27.7 35.7,-32.125 v3@82.125,-32.125 ; R8.2 55.4,-115.625 56.275,-114.75 117.925,-114.75 v4(117.925,-114.8) R10.2 ; U3.15 U3.16 v4@71.55,-78.85 ; J1.25@80.675,-60.1 81.975,-60.1 91.775,-60.1 97.575,-54.3 v1(97.575,-28.45) ; v4(176.025,-114.8) 176.025,-117.925 R9.2 ; R7.1 218.335,-29.665 219.1,-28.9 266.02,-28.9 R6.1 ; v10(229.125,-61.075) 233.225,-61.075 234.1,-60.2 R11.2@234.1,-58.825 ; R33.2 R34.2 v3@246.525,-9.7
  other v3: 256.025,-28.925
+5: ENCODER_MAIN1.2 J1.43 X1.4 | length 280.1
  Top Layer, Top w0.3: X1.4 12.945,-116.68 14.175,-115.45 28.275,-115.45 32.4,-111.325 66.775,-111.325 67.9,-110.2 v3(67.9,-73.875)
  Bottom Layer, Bottom w0.3: v3@67.85,-73.875 72.35,-73.875 77.125,-69.1 J1.43 80.675,-69.1 81.975,-69.1 240.325,-69.1 247.27,-62.155 ENCODER_MAIN1.2@247.27,-61.925
+12: C1.2 C2.1 C5.1 C6.1 C7.1 C8.1 C9.1 C10.1 F2.1 Q1.4 RF-UNIT1.2 U2.1 U2.2 U2.6 | length 138.2
  Top Layer, Top w2: v4(56.175,-19.55) 64.425,-11.3 68.325,-11.3 69.225,-12.2 77.6,-12.2 79.8,-10 v5(83.75,-10) v5(85.75,-10) v5(87.75,-10) 110.625,-10 125.225,-24.6 140.925,-24.6 143.05,-22.475 v5@143.05,-17.625
  Bottom Layer, Bottom w0.6: v4@56.36,-19.535 U2.6 ; U2.2 U2.1
  Bottom Layer, Bottom w1.254: 63.212,-16.613 C2.1 63.262,-11.3 v4(65.2,-11.3) ; v4@65.15,-11.35 C1.2
  Bottom Layer, Bottom w1.5: C8.1 C9.1 C10.1 C6.1 C7.1 C5.1@164.827,-12.865
  Bottom Layer, Bottom w2: C5.1@164.805,-12.797 RF-UNIT1.2
  other v5: 141.45,-17.4 143.25,-17.4 145.05,-17.4
+LCD_3V3: D4.1 L1.1 U1.25 U1.33 | length 89.6
  Top Layer, Top w0.8: U1.33 26.838,-78.438 25.775,-77.375 25.775,-68.278 ; U1.25 25.775,-68.278 ; v8@43.75,-21.35 41.6,-19.2 26,-19.2 22.25,-22.95 22.25,-64.753 25.775,-68.278
  Bottom Layer, Bottom w0.8: L1.1@43.7,-18.073 L1.1@43.85,-17.923
  Bottom Layer, Bottom w2: v8@43.7,-21.4 L1.1@43.7,-18.073
  other v8: 43.675,-21.4
AD1_CS: J1.35 U3.10 | length 31.2
  Top Layer, Top w0.3: v3(62.025,-67.175) v3(70.575,-67.175)
  Bottom Layer, Bottom w0.3: U3.10 v3(62.025,-67.175) ; v3@70.55,-67.175 v3(70.575,-67.175) 74.6,-67.175 76.675,-65.1 J1.35 J1.35@80.675,-65.1
CLK: J1.33 R29.2 U3.13 | length 121.3
  Bottom Layer, Bottom w0.3: R29.2 21.75,-31.95 24.95,-35.15 24.95,-79.55 27.275,-81.875 44.4,-81.875 45.575,-80.7 65.425,-80.7 65.835,-80.29 U3.13 65.835,-68.54 70.275,-64.1 J1.33 J1.33@80.675,-64.1
CPU_PW_HOLD: J1.23 Q2.1 R5.2 | length 48.5
  Bottom Layer, Bottom w0.254: J1.23@80.675,-59.1 81.975,-59.1 87.45,-59.1 89.625,-56.925 89.625,-35.675 92.45,-32.85 R5.2 R5.2@92.4,-23.375
  Bottom Layer, Bottom w0.6: R5.2@92.4,-23.375 Q2.1
CPU_PW_ON: C11.2 D3.2 J1.22 | length 45.5
  Bottom Layer, Bottom w0.254: J1.22@80.675,-58.6 81.975,-58.6 87.025,-58.6 88.875,-56.75 88.875,-35.625 85.9,-32.65 C11.2
  Bottom Layer, Bottom w0.6: D3.2 C11.2
DCDC_SYNC: J1.44 U2.5 | length 61.6
  Top Layer, Top w0.2: v7(57.6,-21.8) 61.548,-25.748 61.548,-32.548 68.3,-39.3 69.9,-39.3 76.3,-45.7 76.3,-60.7 79.4,-63.8 79.4,-68.9 v7(78.5,-69.8)
  Bottom Layer, Bottom w0.2: v7(57.6,-21.8) 58.15,-21.25 U2.5 ; v7(78.5,-69.8) 78.635,-69.8 78.835,-69.6 79.525,-69.6
  Bottom Layer, Bottom w0.3: 79.525,-69.6 J1.44
E1A: C18.2 ENCODER_MAIN1.3 J1.40 | length 169.2
  Top Layer, Top w0.3: v3(234.525,-65.075) 241.58,-65.075 ENCODER_MAIN1.3@244.73,-61.925
  Bottom Layer, Bottom w0.3: J1.40@80.675,-67.6 81.975,-67.6 232.075,-67.6 v3@234.45,-65.225 ; C18.2 C18.2@244.73,-59.055
  Bottom Layer, Bottom w0.6: ENCODER_MAIN1.3@244.73,-61.925 C18.2@244.73,-59.055
E1B: C17.2 ENCODER_MAIN1.4 J1.41 | length 167
  Bottom Layer, Bottom w0.3: J1.41@80.675,-68.1 81.975,-68.1 236.015,-68.1 ENCODER_MAIN1.4@242.19,-61.925 ; C17.2@242.1,-59.025 C17.2@242.19,-59.115
  Bottom Layer, Bottom w0.6: ENCODER_MAIN1.4@242.19,-61.925 C17.2@242.19,-59.115
E2A: C16.2 ENC1.3 J1.37 R34.1 | length 212.9
  Top Layer, Top w0.3: v3(213.825,-20.225) 220.05,-14 245.61,-14 ENC1.3
  Bottom Layer, Bottom w0.3: J1.37@80.675,-66.1 81.975,-66.1 198.793,-66.1 213.825,-51.068 v3@213.825,-20.375
  Bottom Layer, Bottom w0.6: R34.1 248.455,-14.425 248.515,-14.485 ENC1.3@248.515,-16.88
E2B: C14.2 ENC1.5 J1.38 R33.1 | length 203.5
  Bottom Layer, Bottom w0.3: J1.38@80.675,-66.6 81.975,-66.6 199,-66.6 214.325,-51.275 214.325,-22.725 222.625,-14.425 C14.2
  Bottom Layer, Bottom w0.6: C14.2 243.42,-14.425 243.435,-14.44 ENC1.5@243.435,-16.88
ENC2_SW: ENC1.2 R24.1 | length 142.4
  Top Layer, Top w0.3: v3(179.05,-82.575) 179.05,-70.275 182.225,-67.1 199.275,-67.1 214.875,-51.5 214.875,-42.625 220,-37.5 242.475,-37.5 ENC1.2
  Bottom Layer, Bottom w0.3: R24.1 179.075,-121.85 178.95,-121.725 179.05,-121.625 v3(179.05,-82.575)
GND: C1.1 C2.2 C3.2 C4.1 C5.2 C6.2 C7.2 C8.2 C9.2 C10.2 C11.1 C12.1 C13.2 C14.1 C15.2 C16.1 C17.1 C18.1 D4.2 ENC1.1 ENC1.4 ENC1.6 ENC1.7 ENCODER_MAIN1.1 ESP-1.1 J1.27 J1.28 J1.45 J1.46 J1.47 J2.6 J2.MP1 J2.MP2 J2.MP3 J2.MP4 J2.MP5 J2.MP6 J3.1 J4.1 J5.1 MIC_OUT1.2 MOTHERBOARD1.1 pad.2 pad.6 pad.8 PTT_OUT1.2 Q2.2 R1.1 R5.1 R6.3 R6.4 R6.5 R7.3 R7.4 R7.5 R30.1 R31.1 R32.1 RF-UNIT1.1 S1.3 S1.4 S2.3 S2.4 S3.3 S3.4 S4.3 S4.4 S5.3 S5.4 S6.3 S6.4 S7.3 S7.4 S8.3 S8.4 S9.3 S9.4 S10.3 S10.4 S11.3 S11.4 S12.3 S12.4 T1.LCG1 U1.2 U1.26 U1.34 U2.4 U2.8 U2.9 U3.9 U3.14 U4.2 U5.2 X1.3 X2.1 | length 14.5
  Bottom Layer, Bottom w0.3: 79.575,-61.35 80.675,-61.35 ; J1.45 80.5,-70.9 80.024,-71.376 80.024,-71.624 80.2,-71.8 83.55,-71.8 J1.46 ; J1.28 81.8,-61.6 ; J1.27@80.675,-61.1 81.95,-61.1 ; ESP-1.1 116,-25.925
  other v1: 194.147,-125.955 196.691,-125.955 199.236,-125.955 201.78,-125.955 204.324,-125.955 206.869,-125.955 209.413,-125.955 211.958,-125.955 214.502,-125.955 217.046,-125.955 219.591,-125.955 222.135,-125.955 224.68,-125.955 227.224,-125.955 229.768,-125.955 232.313,-125.955 234.857,-125.955 237.402,-125.955 239.946,-125.955 242.49,-125.955 245.035,-125.955 247.579,-125.955 250.124,-125.955 252.668,-125.955 255.212,-125.955 257.757,-125.955 260.301,-125.955 262.846,-125.955 265.39,-125.955 267.934,-125.955 270.479,-125.955 273.023,-125.955 59.023,-83.509 47.523,-83.309 43.423,-80.109 52.723,-79.009 59.023,-78.809 43.423,-76.509 46.223,-73.709 52.523,-73.709 60.723,-73.609 102.897,-72.093 105.638,-72.093 108.38,-72.093 111.121,-72.093 113.863,-72.093 116.604,-72.093 119.345,-72.093 122.087,-72.093 124.828,-72.093 127.57,-72.093 130.311,-72.093 133.053,-72.093 135.794,-72.093 138.536,-72.093 141.277,-72.093 144.018,-72.093 146.76,-72.093 149.501,-72.093 152.243,-72.093 154.984,-72.093 157.726,-72.093 160.467,-72.093 163.209,-72.093 165.95,-72.093 168.691,-72.093 171.433,-72.093 176.916,-72.093 182.05,-72.093 184.273,-72.093 186.497,-72.093 188.72,-72.093 190.943,-72.093 193.166,-72.093 147.5,-71.5 152.147,-64.455 154.871,-64.455 157.594,-64.455 160.318,-64.455 163.042,-64.455 165.766,-64.455 168.49,-64.455 171.214,-64.455 173.938,-64.455 176.662,-64.455 179.385,-64.455 182.109,-64.455 184.833,-64.455 187.557,-64.455 190.281,-64.455 193.005,-64.455 199.784,-61.008 65.723,-59.509 70.923,-59.509 75.023,-59.409 199.784,-57.353 199.784,-53.699 199.784,-50.044 199.784,-46.39 199.784,-42.735 199.784,-39.081 199.784,-35.427 199.784,-31.772 43.823,-29.009 47.09,-29.009 50.357,-29.009 53.623,-29.009 56.89,-29.009 60.157,-29.009 63.423,-29.009 70.723,-28.909 199.784,-28.118 36.623,-26.709 70.723,-25.609 40.023,-25.509 42.89,-25.509 45.757,-25.509 48.623,-25.509 199.784,-24.463 46.823,-23.709 40.023,-23.309 36.623,-22.709 70.723,-22.309 60.868,-21.578 40.023,-21.109 199.784,-20.809 46.823,-20.709 60.868,-19.069 70.723,-19.009 66.323,-17.709 50.923,-17.409 52.623,-17.409 199.784,-17.154 40.023,-16.409 54.823,-15.509 56.923,-15.509 66.323,-15.409 40.023,-14.009 43.373,-14.009 46.723,-14.009 199.784,-13.5 58.323,-13.109 46.723,-12.009 36.623,-11.709 40.023,-11.709 56.023,-11.409 199.784,-9.845 70.723,-9.609 40.023,-9.409 63.323,-9.409 36.623,-7.909 40.023,-7.109 70.723,-6.709 199.784,-6.191 36.623,-4.109 44.123,-4.009 47.39,-4.009 50.657,-4.009 53.923,-4.009 57.19,-4.009 60.457,-4.009 63.723,-4.009 70.623,-3.909 144.273,-1.731 148.079,-1.731 151.885,-1.731 155.691,-1.731 159.498,-1.731 163.304,-1.731 167.11,-1.731 170.916,-1.731 174.722,-1.731 178.528,-1.731 182.334,-1.731 186.14,-1.731 189.946,-1.731 193.752,-1.731 197.558,-1.731 201.364,-1.731 205.17,-1.731 208.976,-1.731 212.782,-1.731 216.588,-1.731 220.394,-1.731 224.201,-1.731 228.007,-1.731 231.813,-1.731 235.619,-1.731 239.425,-1.731 243.231,-1.731 247.037,-1.731 250.843,-1.731 254.649,-1.731 258.455,-1.731 262.261,-1.731 266.067,-1.731 269.873,-1.731
  other v2: 2.881,-120.862 10.881,-120.862 18.881,-120.862 34.881,-120.862 50.881,-120.862 66.881,-120.862 74.881,-120.862 90.881,-120.862 98.881,-120.862 106.881,-120.862 122.881,-120.862 130.881,-120.862 138.881,-120.862 146.881,-120.862 154.881,-120.862 162.881,-120.862 170.881,-120.862 186.881,-120.862 38.881,-112.862 46.881,-112.862 54.881,-112.862 62.881,-112.862 78.881,-112.862 86.881,-112.862 94.881,-112.862 102.881,-112.862 110.881,-112.862 126.881,-112.862 134.881,-112.862 142.881,-112.862 150.881,-112.862 158.881,-112.862 166.881,-112.862 2.881,-104.862 26.881,-104.862 34.881,-104.862 42.881,-104.862 50.881,-104.862 58.881,-104.862 74.881,-104.862 82.881,-104.862 90.881,-104.862 98.881,-104.862 106.881,-104.862 30.881,-96.862 38.881,-96.862 46.881,-96.862 54.881,-96.862 78.881,-96.862 86.881,-96.862 94.881,-96.862 102.881,-96.862 110.881,-96.862 2.881,-88.862 10.881,-88.862 18.881,-88.862 26.881,-88.862 34.881,-88.862 42.881,-88.862 50.881,-88.862 58.881,-88.862 66.881,-88.862 74.881,-88.862 82.881,-88.862 90.881,-88.862 98.881,-88.862 106.881,-88.862 6.881,-80.862 14.881,-80.862 94.881,-80.862 102.881,-80.862 110.881,-80.862 18.881,-72.862 74.881,-72.862 90.881,-72.862 14.881,-64.862 62.881,-64.862 86.881,-64.862 94.881,-64.862 102.881,-64.862 110.881,-64.862 2.881,-56.862 18.881,-56.862 26.881,-56.862 82.881,-56.862 90.881,-56.862 106.881,-56.862 6.881,-48.862 14.881,-48.862 86.881,-48.862 94.881,-48.862 102.881,-48.862 110.881,-48.862 26.881,-40.862 66.881,-40.862 74.881,-40.862 82.881,-40.862 90.881,-40.862 106.881,-40.862 30.881,-32.862 94.881,-32.862 110.881,-32.862 2.881,-24.862 26.881,-24.862 34.881,-24.862 74.881,-24.862 82.881,-24.862 90.881,-24.862 98.881,-24.862 106.881,-24.862 114.881,-24.862 122.881,-24.862 146.881,-24.862 154.881,-24.862 162.881,-24.862 170.881,-24.862 6.881,-16.862 22.881,-16.862 30.881,-16.862 46.881,-16.862 94.881,-16.862 102.881,-16.862 110.881,-16.862 126.881,-16.862 158.881,-16.862 166.881,-16.862 174.881,-16.862 2.881,-8.862 10.881,-8.862 18.881,-8.862 26.881,-8.862 58.881,-8.862 74.881,-8.862 114.881,-8.862 122.881,-8.862 130.881,-8.862 154.881,-8.862 162.881,-8.862 170.881,-8.862
MIC: J5.2 J5.3 MIC_OUT1.1 X1.2 | length 61.5
  Bottom Layer, Bottom w0.6: X1.2 7.865,-116.385 9.75,-114.5 21.25,-114.5 23,-112.75 23,-95 20.885,-92.885 MIC_OUT1.1 13.02,-84.1 ; J5.2 9.5,-84.308 9.883,-83.925 14.467,-83.925 J5.3
MISO: J1.29 J2.7 U3.12 | length 121.4
  Top Layer, Top w0.3: v3(15,-40) 15,-41 20.1,-46.1 20.1,-78 23.3,-81.2 34.2,-81.2 44.7,-70.7 v3(64.575,-70.7)
  Bottom Layer, Bottom w0.3: v3(15,-40) 15.087,-39.913 16.324,-39.913 J2.7 ; U3.12 64.565,-70.7 64.565,-67.535 70,-62.1 J1.29 J1.29@80.675,-62.1
MOSI: J1.30 R28.2 U3.11 | length 142.7
  Top Layer, Top w0.3: v3(39.75,-82.725) 39.75,-76.825 44.775,-71.8 67.35,-71.8 73.325,-65.825 v3(73.325,-63.175) v3(66.575,-63.175)
  Bottom Layer, Bottom w0.3: R28.2 21.725,-34.525 24,-36.8 24,-80 26.775,-82.775 v3@39.8,-82.775 ; U3.11 63.295,-66.455 66.475,-63.275 v3@66.475,-63.175 ; v3@73.4,-63.05 73.85,-62.6 J1.30 J1.30@80.675,-62.6
NetC3_1: C3.1 C4.2 L1.2 L2.2 R2.2 | length 26.5
  Bottom Layer, Bottom w1: L1.2 43.862,-10.213 48.6,-10.213 ; R2.2@50.825,-21.725 48.975,-21.725 48.45,-21.2 48.45,-10.363 48.6,-10.213 ; L2.2@51.7,-15.35 L2.2 51.675,-10.875 C3.1 51.013,-10.213 48.6,-10.213
NetD1_1: D1.1 F1.2 T1.P | length 11.5
  Bottom Layer, Bottom w2: F1.2 132.21,-14.723 T1.P 132.3,-10.921 D1.1
NetD1_2: D1.2 IN1.1 T1.PSG | length 13.3
  Bottom Layer, Bottom w2: D1.2 137.168,-6.471 IN1.1 T1.PSG@137.32,-14.813
NetD2_1: D2.1 D3.1 R4.1 S1.1 S1.2 | length 92.8
  Bottom Layer, Bottom w0.6: S1.2 S1.1 15.25,-21 20.75,-26.5 31.55,-26.5 36.05,-31 77.38,-31 80.625,-27.755 D3.1 D2.1 R4.1
NetD2_2: D2.2 Q1.1 Q2.3 R3.1 | length 20.5
  Top Layer, Top w0.6: v3(78.575,-19.875) 84.45,-19.875 v3(85.625,-21.05)
  Bottom Layer, Bottom w0.254: Q2.3@91.375,-17.3 Q2.3
  Bottom Layer, Bottom w0.6: v3@78.575,-19.975 R3.1 ; D2.2 87.325,-21.075 87.915,-20.485 Q1.1 Q2.3@91.375,-17.3
NetESP-1_4: ESP-1.4 J1.31 | length 52.8
  Bottom Layer, Bottom w0.254: J1.31@80.675,-63.1 81.975,-63.1 91.425,-63.1 99.575,-54.95 99.575,-29.49 ESP-1.4
NetESP-1_5: ESP-1.5 J1.32 | length 56.3
  Bottom Layer, Bottom w0.254: J1.32@80.675,-63.6 81.975,-63.6 91.7,-63.6 100.275,-55.025 100.275,-35.125 104.175,-31.225 108,-31.225 ESP-1.5
NetF1_1: F1.1 IN1.2 | length 25.7
  Bottom Layer, Bottom w2: F1.1 124.8,-4.45 126.75,-2.5 139.75,-2.5 141.13,-3.88 IN1.2
NetF2_2: F2.2 MOTHERBOARD1.2 | length 10.2
  Bottom Layer, Bottom w2: 141.75,-10.1 147.975,-10.1 149.157,-8.918 MOTHERBOARD1.2
NetJ1_1: J1.1 U1.19 | length 68.5
  Top Layer, Top w0.3: U1.19 30,-61.975 57.175,-61.975 63.025,-56.125 63.025,-48.075 66.825,-44.275 v3@69.675,-41.425
  Bottom Layer, Bottom w0.3: v3(69.7,-41.325) 71.55,-41.325 78.325,-48.1 J1.1 J1.1@80.675,-48.1
NetJ1_2: J1.2 U1.20 | length 64.1
  Top Layer, Top w0.3: U1.20 57.217,-60.658 62.225,-55.65 62.225,-47.75 v3@67.475,-42.5
  Bottom Layer, Bottom w0.3: v3(67.525,-42.4) 71.45,-42.4 77.65,-48.6 J1.2 J1.2@80.675,-48.6
NetJ1_3: J1.3 U1.21 | length 68.1
  Top Layer, Top w0.3: U1.21 29.96,-64.475 57.325,-64.475 64.475,-57.325 64.475,-49.625 v3@70.65,-43.45
  Bottom Layer, Bottom w0.3: v3(70.7,-43.35) 76.45,-49.1 J1.3 J1.3@80.675,-49.1
NetJ1_4: J1.4 U1.22 | length 64.8
  Top Layer, Top w0.3: U1.22 57.277,-63.198 63.675,-56.8 63.675,-48.8 v3@68.975,-43.5
  Bottom Layer, Bottom w0.3: v3(69,-43.475) 75.125,-49.6 J1.4 J1.4@80.675,-49.6
NetJ1_5: J1.5 U1.23 | length 67.2
  Top Layer, Top w0.3: U1.23 29.945,-67 56,-67 65.15,-57.85 65.15,-50.6 v3@69.725,-46.025
  Bottom Layer, Bottom w0.3: v3(69.725,-45.975) 73.85,-50.1 J1.5 J1.5@80.675,-50.1
NetJ1_6: J1.6 U1.3 | length 56.8
  Bottom Layer, Bottom w0.3: U1.3 29.923,-39.098 60.598,-39.098 72.1,-50.6 J1.6@80.25,-50.6
NetJ1_7: J1.7 U1.4 | length 53.5
  Bottom Layer, Bottom w0.3: U1.4 61.088,-40.338 71.85,-51.1 J1.7@80.25,-51.1
NetJ1_8: J1.8 U1.5 | length 56.2
  Bottom Layer, Bottom w0.3: U1.5 29.936,-41.625 61.625,-41.625 71.6,-51.6 J1.8@80.25,-51.6
NetJ1_9: J1.9 U1.6 | length 52.8
  Bottom Layer, Bottom w0.3: U1.6 62.128,-42.878 71.35,-52.1 J1.9@80.25,-52.1
NetJ1_10: J1.10 U1.7 | length 55.6
  Bottom Layer, Bottom w0.3: U1.7 29.951,-44.15 62.725,-44.15 71.175,-52.6 J1.10@80.25,-52.6
NetJ1_11: J1.11 U1.8 | length 52.2
  Bottom Layer, Bottom w0.3: U1.8 63.218,-45.418 70.9,-53.1 J1.11@80.25,-53.1
NetJ1_12: J1.12 U1.9 | length 54.9
  Bottom Layer, Bottom w0.3: U1.9 29.941,-46.7 63.7,-46.7 70.6,-53.6 J1.12@80.25,-53.6
NetJ1_13: J1.13 U1.10 | length 51.6
  Bottom Layer, Bottom w0.3: U1.10 64.322,-47.958 70.464,-54.1 J1.13@80.25,-54.1
NetJ1_14: J1.14 U1.11 | length 54.3
  Bottom Layer, Bottom w0.3: U1.11 29.956,-49.225 64.875,-49.225 70.25,-54.6 J1.14@80.25,-54.6
NetJ1_15: J1.15 U1.12 | length 50.9
  Bottom Layer, Bottom w0.3: U1.12 65.423,-50.498 70.025,-55.1 J1.15@80.25,-55.1
NetJ1_16: J1.16 U1.13 | length 53.7
  Bottom Layer, Bottom w0.3: U1.13 29.921,-51.8 65.925,-51.8 69.725,-55.6 J1.16@80.25,-55.6
NetJ1_17: J1.17 U1.14 | length 50.3
  Bottom Layer, Bottom w0.3: U1.14 66.338,-53.038 69.4,-56.1 J1.17@80.25,-56.1
NetJ1_18: J1.18 U1.15 | length 53
  Bottom Layer, Bottom w0.3: U1.15 29.961,-54.3 66.7,-54.3 69,-56.6 J1.18@80.25,-56.6
NetJ1_19: J1.19 U1.16 | length 49.7
  Bottom Layer, Bottom w0.3: U1.16 67.078,-55.578 68.6,-57.1 J1.19@80.25,-57.1
NetJ1_20: J1.20 U1.17 | length 52.4
  Bottom Layer, Bottom w0.3: U1.17 29.951,-56.85 67.4,-56.85 68.15,-57.6 J1.20@80.25,-57.6
NetJ1_21: J1.21 U1.18 | length 49
  Bottom Layer, Bottom w0.3: U1.18 31.241,-58.1 J1.21@80.25,-58.1
NetJ2_2: J2.2 R27.1 R32.2 | length 14.5
  Top Layer, Top w0.3: v3(15,-34.5) 18.5,-38 v3(18.5,-42.5)
  Bottom Layer, Bottom w0.3: v3(15,-34.5) 15.088,-34.412 16.324,-34.412 J2.2 ; R32.2 18.5,-41.1 v3(18.5,-42.5)
  Bottom Layer, Bottom w0.6: R32.2 R27.1
NetJ2_3: J2.3 R28.1 R31.2 | length 4
  Bottom Layer, Bottom w0.3: J2.3 18.3,-35.425 18.4,-35.525
  Bottom Layer, Bottom w0.6: R31.2 18.4,-35.525 R28.1
NetJ2_5: J2.5 R29.1 R30.2 | length 14
  Top Layer, Top w0.3: v3(15,-37.5) 14,-36.5 14,-33 v3(17,-30)
  Bottom Layer, Bottom w0.3: v3(15,-37.5) 15.062,-37.563 16.349,-37.563 J2.5 ; v3(17,-30) 18.375,-30 R30.2
  Bottom Layer, Bottom w0.6: R29.1 R30.2
NetJ3_2: J3.2 X2.2 | length 13.6
  Bottom Layer, Bottom w0.6: X2.2 7.385,-65.615 9.5,-63.5 J3.2
NetJ3_3: J3.3 X2.3 | length 18.1
  Bottom Layer, Bottom w0.6: X2.3 7.245,-68.155 14.5,-60.9 J3.3
NetJ4_2: J4.2 X2.4 | length 6
  Bottom Layer, Bottom w0.6: X2.4 9.2,-70.695 9.5,-70.395 J4.2
NetJ4_3: J4.3 X2.5 | length 13.1
  Bottom Layer, Bottom w0.6: X2.5 13.465,-73.235 14.5,-72.2 J4.3
NetL2_1: L2.1 U2.7 | length 7
  Bottom Layer, Bottom w0.6: L2.1 52.725,-19.475 53.935,-18.265 U2.7
NetR1_2: R1.2 R2.1 U2.3 | length 20.4
  Bottom Layer, Bottom w0.6: R1.2@52.725,-23.875 R2.1@52.725,-21.725 ; 52.875,-22.825 65.185,-22.825 66.15,-21.86 66.15,-20.1 65.585,-19.535 U2.3
NetR6_2: R6.2 U3.1 | length 239
  Bottom Layer, Bottom w0.3: U3.1 69.7,-84.195 69.7,-82.5 70.3,-81.9 89.625,-81.9 101.225,-70.3 249.907,-70.3 257.175,-63.032 257.175,-37.925 259.725,-35.375 267.025,-35.375 R6.2
NetR7_2: R7.2 U3.2 | length 261.8
  Bottom Layer, Bottom w0.3: U3.2 68.375,-82.225 69.2,-81.4 89.418,-81.4 101.018,-69.8 249.7,-69.8 256.675,-62.825 256.675,-37.95 254.225,-35.5 224.945,-35.5 R7.2
NetR8_1: R8.1 R13.2 U3.8 | length 40.6
  Bottom Layer, Bottom w0.6: R13.2 R8.1 53.5,-112.025 60.755,-104.77 U3.8
NetR9_1: R9.1 R15.2 U3.5 | length 141
  Bottom Layer, Bottom w0.6: U3.5 64.565,-102.615 68.775,-106.825 167.675,-106.825 174.175,-113.325 R9.1 ; R15.2 174.175,-119.8 174.175,-118.075 R9.1@174.275,-117.975
NetR10_1: R10.1 R12.2 U3.7 | length 90.3
  Bottom Layer, Bottom w0.6: U3.7 62.025,-104.775 66.875,-109.625 116.2,-109.625 119.825,-113.25 R10.1 ; R12.2 R10.1@119.825,-118.15
NetR11_1: R11.1 R14.2 U3.6 | length 241.4
  Top Layer, Top w0.3: v3(167.25,-110.15) 170.05,-112.95 208.575,-112.95 214.725,-106.8 214.725,-68.95 226.7,-56.975 v3(231.4,-56.975)
  Bottom Layer, Bottom w0.3: v3@231.625,-56.925 R11.1
  Bottom Layer, Bottom w0.6: U3.6 63.295,-103.87 67.575,-108.15 165.2,-108.15 v3@167.2,-110.15 ; R11.1 R14.2
NetR12_1: R12.1 R17.2 S3.1 S3.2 | length 13
  Bottom Layer, Bottom w0.6: R17.2 116.813,-123.75 S3.2 S3.1
NetR13_1: R13.1 R18.2 S2.1 S2.2 | length 13.1
  Bottom Layer, Bottom w0.6: S2.2 S2.1 S2.1@50.077,-123.423 ; S2.1@50.077,-123.748 R18.2
NetR14_1: R14.1 R19.2 S4.1 S4.2 | length 19
  Bottom Layer, Bottom w0.6: S4.2@217.65,-52.748 236.648,-52.748 R19.2@236.675,-52.775
NetR15_1: R15.1 R20.2 S5.1 S5.2 | length 20.3
  Top Layer, Top w0.6: S5.1 173.45,-123.75 v3(176.625,-120.575)
  Bottom Layer, Bottom w0.6: S5.2 S5.1 174.15,-123.75 R15.1 ; R20.2 v3@176.612,-120.575
NetR16_1: R16.1 X1.1 | length 17.5
  Bottom Layer, Bottom w0.3: X1.1 5.325,-120.775 7.25,-122.7 R16.1
NetR17_1: R17.1 R21.2 S7.1 S7.2 | length 42.3
  Bottom Layer, Bottom w0.6: R21.2 115.325,-121.875 ; R17.1 115.325,-121.875 ; S7.1 S7.2 140.4,-123.75 138.05,-126.1 116.125,-126.1 115.325,-125.3 115.325,-121.875
NetR18_1: R18.1 R22.2 S6.1 S6.2 | length 14.4
  Bottom Layer, Bottom w0.6: R18.1 58.823,-121.848 R22.2 61.389,-121.875 S6.2 S6.1
NetR19_1: R19.1 R23.2 S8.1 S8.2 | length 13.4
  Bottom Layer, Bottom w0.6: R19.1 R23.2 240.723,-54.675 S8.2 S8.1
NetR20_1: R20.1 R24.2 S9.1 S9.2 | length 13.2
  Bottom Layer, Bottom w0.6: R20.1 R24.2 189.825,-123.775 S9.1
NetR21_1: R21.1 S11.1 S11.2 | length 10.5
  Bottom Layer, Bottom w0.6: S11.2 S11.1 113.725,-123.75 R21.1
NetR22_1: R22.1 S10.1 S10.2 | length 33.6
  Bottom Layer, Bottom w0.6: R22.1 58.85,-124.95 60.05,-126.15 77.95,-126.15 80.35,-123.75 S10.2 S10.1
NetR23_1: R23.1 S12.1 S12.2 | length 37.8
  Top Layer, Top w0.6: v3@239.175,-51.2 v3(239.175,-51.3) 239.925,-50.55 265.577,-50.55 S12.2
  Bottom Layer, Bottom w0.6: R23.1 v3@239.175,-51.425 ; S12.2@267.9,-52.748 S12.1@274.4,-52.748
NetR25_1: R25.1 U4.1 X1.5 | length 14.4
  Bottom Layer, Bottom w0.3: X1.5 15.485,-116.515 16.3,-115.7 22.15,-115.7 23.025,-114.825 R25.1 27.325,-114.825 U4.1
NetR26_1: R26.1 U5.1 X1.6 | length 23.1
  Top Layer, Top w0.3: X1.6 31.45,-118.35 32.875,-116.925 v3@32.875,-113.375
  Bottom Layer, Bottom w0.3: v3(32.875,-113.275) R26.1 35.375,-114.825 U5.1
PTT: C12.2 PTT_OUT1.1 R16.2 | length 12
  Bottom Layer, Bottom w0.3: R16.2 C12.2 27.35,-124.7 28.7,-123.35 31.085,-123.35 PTT_OUT1.1
PTT_SW1: U3.3 U4.3 U4.4 | length 68.8
  Bottom Layer, Bottom w0.3: U4.4 U4.3 29.275,-112.825 30.925,-111.175 35.45,-111.175 36.825,-109.8 36.825,-90.85 46.425,-81.25 66.175,-81.25 67.105,-82.18 U3.3
PTT_SW2: U3.4 U5.3 U5.4 | length 60.5
  Bottom Layer, Bottom w0.3: U5.4 U5.3
  Bottom Layer, Bottom w0.4: U5.3 37.325,-91.2 46.65,-81.875 65.425,-81.875 65.835,-82.285 U3.4
SD_CS: J1.34 R27.2 | length 116.9
  Top Layer, Top w0.3: v3(39.5,-86) 41.65,-83.85 41.65,-76.025 45.325,-72.35 67.675,-72.35 v3@74.75,-65.275
  Bottom Layer, Bottom w0.3: R27.2 21.2,-39 22.1,-39.9 22.1,-80.4 27.7,-86 v3(39.5,-86) ; v3(74.8,-65.2) 75.4,-64.6 J1.34 J1.34@80.675,-64.6
T_INT: J1.39 U1.30 | length 59.5
  Top Layer, Top w0.3: U1.30 33.217,-73.358 38.725,-67.85 56.575,-67.85 63.625,-60.8 75.45,-60.8 78.05,-63.4 v3@78.05,-67.1
  Bottom Layer, Bottom w0.3: v3@78,-67.1 J1.39 J1.39@80.675,-67.1
  other v3: 78.025,-67.1
T_SCL: J1.42 U1.32 | length 53.3
  Top Layer, Top w0.3: U1.32 32.977,-75.898 40.1,-68.775 66.775,-68.775 v3(67.75,-69.75)
  Bottom Layer, Bottom w0.3: v3(67.75,-69.75) 72.775,-69.75 73.925,-68.6 J1.42 J1.42@80.675,-68.6
T_SDA: J1.36 U1.31 | length 64.7
  Top Layer, Top w0.3: U1.31 29.906,-74.675 32.95,-74.675 39.3,-68.325 56.736,-68.325 63.811,-61.25 74.825,-61.25 76.025,-62.45 v3@76.025,-67.75
  Bottom Layer, Bottom w0.3: v3@76,-67.525 76.125,-67.525 78.05,-65.6 J1.36 J1.36@80.675,-65.6
  other v3: 76.025,-67.625
VCC12_IN: Q1.3 R3.2 R4.2 T1.LCP | length 76.4
  Bottom Layer, Bottom w1: R3.2 R4.2@80.6,-16.325
  Bottom Layer, Bottom w2: Q1.3@82.975,-16.35 82.625,-16 81,-16 77.4,-12.4 77.4,-7.7 80.5,-4.6 92.9,-4.6 103.05,-14.75 118.235,-14.75 123.298,-19.813 T1.LCP
pads on no net: ESP-1.2 ESP-1.3 ESP-1.7 J2.1 J2.8 T1.LCG2 T1.LCG3 U1.1 U1.24 U1.27 U1.28 U1.29 U4. U5. X2.6
copper on no net:
  other v6: 30.84,-105.1 204.46,-105.07 30.33,-11 204.46,-11

## Polygon pours and split planes (outlines as drawn)
GND on Bottom Layer, Bottom "Bottom Layer, Bottom-No Net 3" (solid, remove dead copper, pour order 2): 0,0 0,-128.5 281,-128.5 281,0
+12 on Bottom Layer, Bottom "Bottom Layer, Bottom-No Net" (solid, pour order 8): 145.5,-17.923 139.75,-17.923 139.75,-14.75 140,-14.5 144.675,-14.5 145,-14.175 145,-11 145.5,-10.5 164.25,-10.5 165.75,-12 165.75,-13.75 165.5,-14 146.675,-14 146,-14.675 146,-17.923
NetF2_2 on Bottom Layer, Bottom "Bottom Layer, Bottom-No Net 1" (solid, pour order 6): 144.5,-12.248 144.5,-8.748 150.25,-8.748 150.5,-8.498 150.5,-5.498 150.25,-5.248 144.75,-5.248 143.25,-6.748 143.25,-8.496 142.498,-9.248 140.75,-9.248 140.25,-9.748 140.25,-12.248
GND on Top Layer, Top "Top Layer, Top-No Net" (solid, remove dead copper, pour order 0): 0,0 0,-128.5 281,-128.5 281,0

## Keep-outs
Keep-Out Layer, Board:
  lines w0.2: 0,-128.5 0,-1 0,0 281,0 281,-128.5 0,-128.5 ; 2.5,-111 4.75,-111 4.75,-112.25 8.5,-112.25 8.5,-111 15,-111 15,-112.25 18.75,-112.25 18.75,-111 21,-111 21,-109 18.75,-109 18.75,-95.5 4.75,-95.5 4.75,-109 2.5,-109 2.5,-111